# EAGLE board SOIC16_SO16L-DIP (EAGLE 8.4.3)
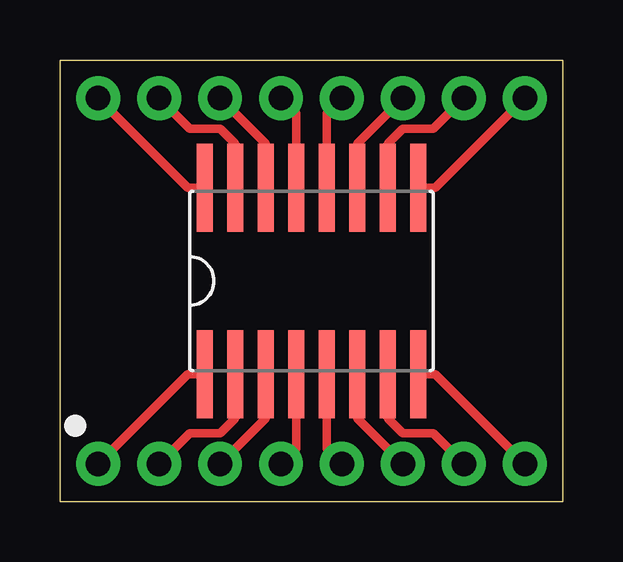
[diagram p0: board, top side]
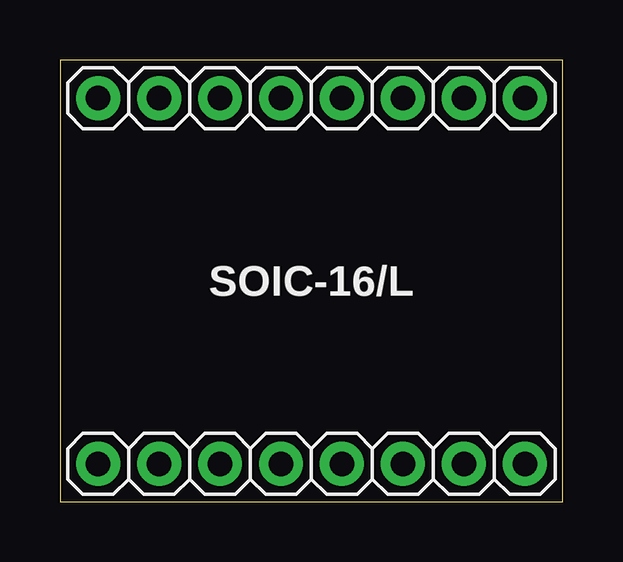
[diagram p1: board, bottom side, seen from below]

Size 20.95 x 18.41 mm. Coordinates in mm from the lower left corner, seen from the top.
Outline: 0,0 0,18.41 20.95,18.41 20.95,0 0,0
Copper layers (1*16): Top 0.035mm / dielectric 1.6mm / Bottom 0.035mm
Design rules "Elecrow_2-layer_PCB_eagle_rule *": minimum track width 6mil, minimum drill 12mil, track to track 6mil, track to pad 6mil, pad to pad 6mil, via to via 8mil, smd to smd 0mil, copper to edge 20mil, drill to drill 10mil, minimum pad ring 16mil, minimum via ring 6mil, stop-mask expansion 0mil, vias tented up to drill 100mil, thermal gap 10mil

## Footprints (pad centres in the part's own frame; a part is rotated, then mirrored left to right if it is on the bottom)
ADAPTER-16L = drill 1.016: 1 1.587,1.587; 2 4.128,1.587; 3 6.668,1.587; 4 9.207,1.587; 5 11.748,1.587; 6 14.287,1.587; 7 16.828,1.587; 8 19.367,1.587; 9 19.367,16.828; 10 16.828,16.828; 11 14.287,16.828; 12 11.748,16.828; 13 9.207,16.828; 14 6.668,16.828; 15 4.128,16.828; 16 1.587,16.828
SO16/L = smd 0.66 x 3.658: 1 -4.445,-3.886; 2 -3.175,-3.886; 3 -1.905,-3.886; 4 -0.635,-3.886; 5 0.635,-3.886; 6 1.905,-3.886; 7 3.175,-3.886; 8 4.445,-3.886; 9 4.445,3.886; 10 3.175,3.886; 11 1.905,3.886; 12 0.635,3.886; 13 -0.635,3.886; 14 -1.905,3.886; 15 -3.175,3.886; 16 -4.445,3.886

## Placement (x,y rotation side)
SOIC-16/L  ADAPTER-16L  [ADAPTER-16L]  0,0 0 top
U1  DUMMY16  [SO16/L]  10.48,9.21 0 top

## Library data of the parts
SOIC-16/L = my-pinhead
U1 = my-ic

## Nets
N$1: SOIC-16/L.1 U1.1
N$2: SOIC-16/L.2 U1.2
N$3: SOIC-16/L.3 U1.3
N$4: SOIC-16/L.4 U1.4
N$5: SOIC-16/L.5 U1.5
N$6: SOIC-16/L.6 U1.6
N$7: SOIC-16/L.7 U1.7
N$8: SOIC-16/L.8 U1.8
N$9: SOIC-16/L.14 U1.14
N$10: SOIC-16/L.9 U1.9
N$11: SOIC-16/L.10 U1.10
N$12: SOIC-16/L.11 U1.11
N$13: SOIC-16/L.12 U1.12
N$14: SOIC-16/L.13 U1.13
N$15: SOIC-16/L.15 U1.15
N$16: SOIC-16/L.16 U1.16

## Tracks (layer width: path | path; a pad name or v marks a point on that pad's centre or on a via)
N$1
  Top 0.356: U1.1 5.32,5.32 SOIC-16/L.1
N$2
  Top 0.356: U1.2 7.3,3.49 6.67,2.86 5.4,2.86 SOIC-16/L.2
N$3
  Top 0.356: U1.3 8.57,3.49 SOIC-16/L.3
N$4
  Top 0.356: U1.4 9.84,2.22 SOIC-16/L.4
N$5
  Top 0.356: U1.5 11.11,2.22 SOIC-16/L.5
N$6
  Top 0.356: U1.6 12.38,3.49 SOIC-16/L.6
N$7
  Top 0.356: U1.7 13.65,3.49 14.29,2.86 15.56,2.86 SOIC-16/L.7
N$8
  Top 0.356: U1.8 15.63,5.32 SOIC-16/L.8
N$9
  Top 0.356: U1.14 8.57,14.92 SOIC-16/L.14
N$10
  Top 0.356: U1.9 15.63,13.09 SOIC-16/L.9
N$11
  Top 0.356: U1.10 13.65,14.92 14.29,15.56 15.56,15.56 SOIC-16/L.10
N$12
  Top 0.356: U1.11 12.38,14.92 SOIC-16/L.11
N$13
  Top 0.356: SOIC-16/L.12 11.11,16.19 U1.12
N$14
  Top 0.356: U1.13 9.84,16.19 SOIC-16/L.13
N$15
  Top 0.356: U1.15 7.3,14.92 6.67,15.56 5.4,15.56 SOIC-16/L.15
N$16
  Top 0.356: U1.16 5.32,13.09 SOIC-16/L.16